# Altium PCB ESP32-S3核心板PCB封装尺寸.PcbDoc
Units mil, origin at the board's own origin, x right, y up, seen from the top; angles counter-clockwise.
Board outline 6000 x 4000 mil, 2 copper layers (Top Layer, Bottom Layer); 34 components, 0 nets, 187 pads, 0 vias.
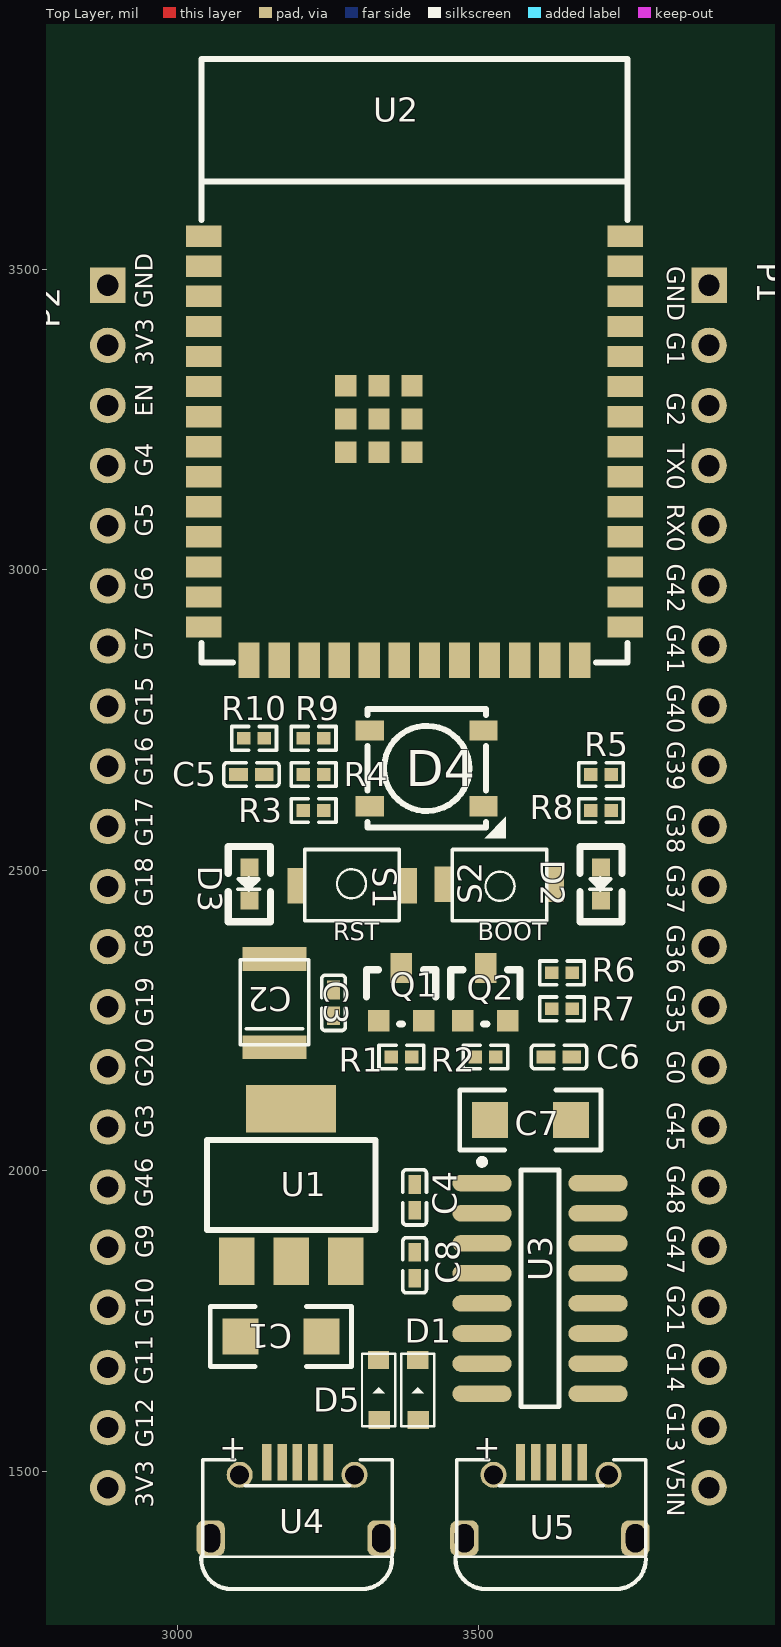
[diagram p0: Top Layer view]
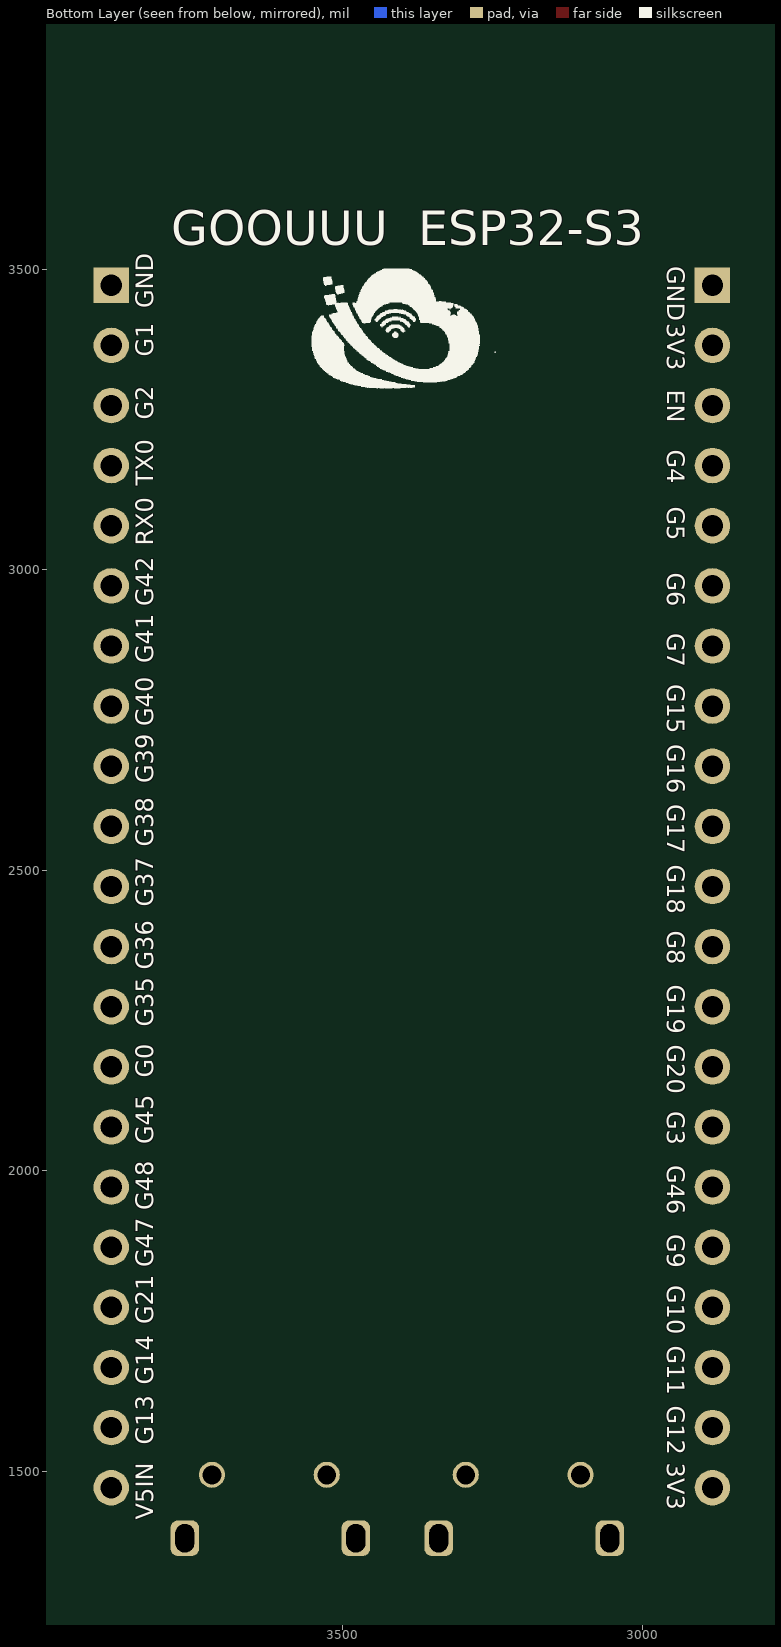
[diagram p1: Bottom Layer view, seen from below]

## Layer stack, top to bottom
Top Solder: solder mask 0.4, Solder Resist, Dk 3.5
Top Layer: signal copper 1.4
Dielectric 1: dielectric 12.6, FR-4, Dk 4.8
Bottom Layer: signal copper 1.4
Bottom Solder: solder mask 0.4, Solder Resist, Dk 3.5

## Board outline
1000,1000 7000,1000 7000,5000 1000,5000

## Design rules (kind name [scope] priority, off if disabled: settings)
Clearance [All] p1: gap=10 ignorepadtopadclearanceinfootprint=FALSE except(0: Arc-Hole Track-Hole SMDPad-Hole THPad-Hole Via-Hole Fill-Hole Poly-Hole Region-Hole Text-Hole)
PolygonConnect [All] p1: connectstyle=Relief reliefconductorwidth=10 reliefentries=4 polygonreliefangle="90 Angle" airgapwidth=10
RoutingVias [All] p1: holewidth=28 width=50 viastyle="Through Hole" minholewidth=28 minwidth=50 maxholewidth=28 maxwidth=50
SolderMaskExpansion [All] p1: expansion=4 istentingtop=FALSE
Width [All] p1: maxlimit=10 minlimit=10 preferedwidth=10
30 further rules are at their usual default settings.

## Components (designator, comment, footprint, x,y, rotation, side; value= is the part's Value field where it differs from the comment)
C1 "" 1206 3239.2,1724.46 r180 top value=100UF
C2 "100UF" 钽电容J107 3104.2,2209.46 r90 top
C3 "104" C0402 3259.2,2279.46 r270 top
C4 "104" C0402 3394.2,1955.92 r270 top
C5 "104" C0402 3122.74,2659.46 r0 top
C6 "104" C0402 3634.2,2189.46 r0 top
C7 "Cap" 1206 3519.2,2084.46 r0 top value=10UF
C8 "104" C0402 3394.2,1843 r270 top
D1 "" D0603 3399.2,1634.46 r90 top
D2 "LED" 0603D 3704.2,2504.46 r270 top
D3 "LED" 0603D 3119.2,2504.46 r270 top
D4 "XL-5050RGBC-WS2812B" LED-SMD_L5.0-W5.0-P3.20-LS5.4-TL 3414.2,2669.46 r0 top
D5 "" D0603 3334.2,1634.46 r90 top
P1 "Header 21" HDR1X21 3883.88,3472.99 r270 top
P2 "Header 21" HDR1X21 2883.88,3472.99 r270 top locked
Q1 "NPN" SOT-23 3334.2,2249.46 r0 top
Q2 "NPN" SOT-23 3474.2,2249.46 r0 top
R1 "12K" R0402 3372.16,2189.46 r180 top
R2 "12K" R0402 3512.16,2189.46 r180 top
R3 "470R" R0402 3226.24,2599.46 r0 top
R4 "12K" R0402 3226.24,2659.46 r180 top
R5 "5K" R0402 3704.2,2659.46 r0 top
R6 "470R" R0402 3639.2,2329.46 r0 top
R7 "470R" R0402 3639.2,2269.46 r0 top
R8 "470R" R0402 3704.2,2599.46 r180 top
R9 "12K" R0402 3226.24,2719.46 r180 top
R10 "0" R0402 3127.16,2719.46 r180 top
S1 "SW-PB" button 3211.2,2534.46 r0 top
S2 "SW-PB" button 3614.2,2416.35 r180 top
U1 "AMS1117-3.3" SOT223 3098.65,1849.46 r0 top
U2 "ESP32-S3-WROOM-1-N8" "ESP32-S3 W1" 3398.91,3254.84 r0 top locked
U3 "CH340C" SO-16_M 3602.75,1804.46 r0 top
U4 "ESP32-OTG" USB_T 3196.98,1452.25 r180 top
U5 "microusb" USB_T 3619.2,1452.25 r180 top

## Footprints (in the part's own frame and the unit in brackets; to place one, negate y for a bottom-side part, rotate by r counter-clockwise, add the part's x,y. Pads: shape width x height; smd on the part's side, far side on the other; paste and mask are expansions set on the pad)
0603D [mil]
  rect 30x30 smd: A(0,0) K(55,0)
  silkscreen extent -35,-35 90,35
1206 [mil]
  rect 60x60 smd: 1(0,0) 2(135,0)
  silkscreen extent -50,-50 185,50
button [mil]
  rect 27.56x59.06 smd: 1(-15,-60) 2(173,-60)
  silkscreen extent 0,-118 157,0
C0402 [mm]
  rect 0.79x0.54 smd: 1(-0.545,0) 2(0.545,0)
  silkscreen extent -1.17,-0.5 1.17,0.5
D0603 [mm]
  rect 0.75x0.9 smd: 1(-1.245,-0.025) 2(1.295,0)
  silkscreen extent -1.5,-0.7 1.55,0.7, body extent -0.77,-0.4 0.83,0.4, height 0.6
"ESP32-S3 W1" [mm]
  rect 1.5x0.9 smd mask+0.05: 1(-9.029,7.61) 2(-9.029,6.34) 3(-9.029,5.07) 4(-9.029,3.8) 5(-9.029,2.53) 6(-9.029,1.26) 7(-9.029,-0.01) 8(-9.029,-1.28) 9(-9.029,-2.55) 10(-9.029,-3.82) 11(-9.029,-5.09) 12(-9.029,-6.36) 13(-9.029,-7.63) 14(-9.029,-8.9) 27(8.771,-8.9) 28(8.771,-7.63) 29(8.771,-6.36) 30(8.771,-5.09) 31(8.771,-3.82) 32(8.771,-2.55) 33(8.771,-1.28) 34(8.771,-0.01) 35(8.771,1.26) 36(8.771,2.53) 37(8.771,3.8) 38(8.771,5.07) 39(8.771,6.34) 40(8.771,7.61)
  rect 0.9x1.5 smd mask+0.05: 15(-7.114,-10.299) 16(-5.844,-10.299) 17(-4.574,-10.299) 18(-3.304,-10.299) 19(-2.034,-10.299) 20(-0.764,-10.299) 21(0.506,-10.299) 22(1.776,-10.299) 23(3.046,-10.299) 24(4.316,-10.299) 25(5.586,-10.299) 26(6.856,-10.299)
  rect 0.9x0.9 smd mask+0.051: 41(-3.029,-1.509) 41(-3.029,-0.109) 41(-3.029,1.291) 41(-1.629,-1.509) 41(-1.629,-0.109) 41(-1.629,1.291) 41(-0.229,-1.509) 41(-0.229,-0.109) 41(-0.229,1.291)
  silkscreen extent -9.13,-10.4 8.87,15.1
HDR1X21 [mm] "Connector; Header; 20 Position"
  rect 1.5x1.5 hole 0.9: 1(0,0)
  round 1.5 hole 0.9: 2(2.54,0) 3(5.08,0) 4(7.62,0) 5(10.16,0) 6(12.7,0) 7(15.24,0) 8(17.78,0) 9(20.32,0) 10(22.86,0) 11(25.4,0) 12(27.94,0) 13(30.48,0) 14(33.02,0) 15(35.56,0) 16(38.1,0) 17(40.64,0) 18(43.18,0) 19(45.72,0) 20(48.26,0) 21(50.8,0)
LED-SMD_L5.0-W5.0-P3.20-LS5.4-TL [mm]
  rect 1.2x0.85 smd mask+0.051: 1(-2.4,1.6) 2(-2.4,-1.6) 3(2.4,1.6) 4(2.4,-1.6)
  silkscreen extent -2.5,-2.95 3.35,2.5
R0402 [mm]
  rect 0.566x0.54 smd: 1(-0.433,0) 2(0.433,0)
  silkscreen extent -0.94,-0.5 0.94,0.5
SO-16_M [mm] "SOIC, 16-Leads, Body 9.9x3.9mm, Pitch 1.27mm, IPC Low Density"
  oval 2.5x0.7 smd: 1(-2.45,4.445) 2(-2.45,3.175) 3(-2.45,1.905) 4(-2.45,0.635) 5(-2.45,-0.635) 6(-2.45,-1.905) 7(-2.45,-3.175) 8(-2.45,-4.445) 9(2.45,-4.445) 10(2.45,-3.175) 11(2.45,-1.905) 12(2.45,-0.635) 13(2.45,0.635) 14(2.45,1.905) 15(2.45,3.175) 16(2.45,4.445)
  silkscreen extent -2.57,-5 0.8,5.47, body extent -2,-5 2,5, height 1.75
SOT223 [mil]
  rect 59x79 smd: 1(0,0) 2(90.55,0) 3(181.1,0)
  rect 150x79 smd: 4(89.88,253.54)
  silkscreen extent -49,52 231,202
SOT-23 [mil]
  rect 36x36 smd: 1(75,0) 2(0,0)
  rect 36x50 smd: 3(38,87.87)
  silkscreen extent -20,-5 95,85
USB_T [mm]
  rect 0.4x1.55 smd: 1(1.244,-1.608) 2(0.593,-1.608) 3(-0.056,-1.608) 4(-0.706,-1.608) 5(-1.356,-1.608)
  rrect50% 1.2x1.5 hole 0.8 slot 1.2 at 90 deg: 6(-3.612,1.608) 6(3.612,1.608)
  round 1.1 hole 0.8: 6(-2.469,-1.072) 6(2.382,-1.072)
  silkscreen extent -4.06,-1.71 3.99,2.39
钽电容J107 [mil]
  rect 39.37x106.3 smd: 1(-4,-57) 2(143,-57)
  silkscreen extent 0,-114 142,0

## Part data
C1 C2: library part "Cap Pol1", "Polarized Capacitor (Radial)", LatestRevisionDate=17-Jul-2002, LatestRevisionNote="Re-released for DXP Platform.", PackageDescription="Polarized Capacitor (Radial); 2 Leads", PackageReference=RB7.6-15, Published=8-Jun-2000, Publisher="Altium Limited"
C3 C4 C5 C6 C8: library part Cap, "Capacitor", LatestRevisionDate=17-Jul-2002, LatestRevisionNote="Re-released for DXP Platform.", PackageDescription="Radial Cap, Thru-Hole; 2 Leads; 0.3 in Pin Spacing", PackageReference=RAD-0.3, Published=8-Jun-2000, Publisher="Altium Limited"
C7: "Capacitor", LatestRevisionDate=17-Jul-2002, LatestRevisionNote="Re-released for DXP Platform.", PackageDescription="Radial Cap, Thru-Hole; 2 Leads; 0.3 in Pin Spacing", PackageReference=RAD-0.3, Published=8-Jun-2000, Publisher="Altium Limited"
D1 D5: library part "DIODE SCHOTTKY", "Schottky Diode"
D4: Color Temperature=-, Emitted Color=RGB三色, JLCPCB Part Class="Extended Part", LCSC Part Name="RGB三色 正贴 幻彩", Lens Color=无色透明, Manufacturer=XINGLIGHT(成兴光), Operating Temperature=-30℃~+70℃, Add into BOM=yes, Convert to PCB=yes, Datasheet=https://atta.szlcsc.com/upload/public/pdf/source/20230111/86AAD2096485A2E5BCAB883FF8CBE6FD.pdf, Device=XL-5050RGBC-WS2812B, Diode Configuration=-, Dominant Wavelength=-, Forward Current=-, Manufacturer Part=XL-5050RGBC-WS2812B, Mounting Sytle=正贴, Name=XL-5050RGBC-WS2812B, Peak Wavelength=625nm；470nm；530nm, Power Dissipation=-, Supplier=LCSC, Supplier Footprint=SMD5050, Supplier Part=C2843785, Symbol=XL-5050RGBC-WS2812B, Viewing Angle=120°
P1 P2: "Header, 20-Pin", LatestRevisionDate=17-Jul-2002, LatestRevisionNote="Re-released for DXP Platform.", Publisher="Altium Limited"
Q1 Q2: "NPN Transistor"
R1 R2 R3 R4 R5 R6 R7 R8 R9 R10: library part RES2
U2: JLCPCB Part Class="Extended Part", Manufacturer=ESPRESSIF(乐鑫), Add into BOM=yes, Convert to PCB=yes, Datasheet=https://atta.szlcsc.com/upload/public/pdf/source/20221026/9A44C6421221D672346AAE72DF9F8146.pdf, Device=ESP32-S3-WROOM-1-N8, LCSC Part Name=ESP32-S3-WROOM-1-N8, Manufacturer Part=ESP32-S3-WROOM-1-N8, Name=ESP32-S3-WROOM-1-N8, Supplier=LCSC, Supplier Footprint=SMD,18x25.5mm, Supplier Part=C2913198, Symbol=ESP32-S3-WROOM-1-N8
U3: library part CH340
U4: library part microusb

## Nets (pads, with @x,y where several pads share a name; then routed paths per layer and width w, separated by ;. In a path a pad name is that pad's centre, name@x,y a point inside that pad or via, vN(x,y) a via of type N, cw(c..) or ccw(c..) an arc to the next point about the centre after c; other vN are vias at no path point)
pads on no net: C1.1 C1.2 C2.1 C2.2 C3.1 C3.2 C4.1 C4.2 C5.1 C5.2 C6.1 C6.2 C7.1 C7.2 C8.1 C8.2 D1.1 D1.2 D2.A D2.K D3.A D3.K D4.1 D4.2 D4.3 D4.4 D5.1 D5.2 P1.1 P1.2 P1.3 P1.4 P1.5 P1.6 P1.7 P1.8 P1.9 P1.10 P1.11 P1.12 P1.13 P1.14 P1.15 P1.16 P1.17 P1.18 P1.19 P1.20 P1.21 P2.1 P2.2 P2.3 P2.4 P2.5 P2.6 P2.7 P2.8 P2.9 P2.10 P2.11 P2.12 P2.13 P2.14 P2.15 P2.16 P2.17 P2.18 P2.19 P2.20 P2.21 Q1.1 Q1.2 Q1.3 Q2.1 Q2.2 Q2.3 R1.1 R1.2 R2.1 R2.2 R3.1 R3.2 R4.1 R4.2 R5.1 R5.2 R6.1 R6.2 R7.1 R7.2 R8.1 R8.2 R9.1 R9.2 R10.1 R10.2 S1.1 S1.2 S2.1 S2.2 U1.1 U1.2 U1.3 U1.4 U2.1 U2.2 U2.3 U2.4 U2.5 U2.6 U2.7 U2.8 U2.9 U2.10 U2.11 U2.12 U2.13 U2.14 U2.15 U2.16 U2.17 U2.18 U2.19 U2.20 U2.21 U2.22 U2.23 U2.24 U2.25 U2.26 U2.27 U2.28 U2.29 U2.30 U2.31 U2.32 U2.33 U2.34 U2.35 U2.36 U2.37 U2.38 U2.39 U2.40 U2.41 U3.1 U3.2 U3.3 U3.4 U3.5 U3.6 U3.7 U3.8 U3.9 U3.10 U3.11 U3.12 U3.13 U3.14 U3.15 U3.16 U4.1 U4.2 U4.3 U4.4 U4.5 U4.6 U5.1 U5.2 U5.3 U5.4 U5.5 U5.6

## Other copper
Top Layer:
  pour cut-out: 2839.2,3574.46 3934.2,3574.46 3934.2,3654.46 2844.2,3654.46 2839.2,3649.46
Bottom Layer:
  pour cut-out: 2839.2,3574.46 3934.2,3574.46 3934.2,3654.46 2844.2,3654.46 2840.09,3651.83

## Silkscreen, mask and mechanical layers (free items; w line width, h text height)
Top Overlay:
  lines w7: 3041.72,1358.95 ccw(c3041.72,1356.43) 3039.2,1356.43 3039.2,1354.46 ccw(c3089.2,1354.46) 3089.2,1304.46 3306.68,1304.46 ccw(c3306.68,1354.46) 3356.68,1354.46 ; 3461.98,1358.07 3461.98,1354.46 ccw(c3511.98,1354.46) 3511.98,1304.46 3728.91,1304.46 ccw(c3728.91,1354.46) 3778.91,1354.46
  text "GND" at 3804.2,3504.46 h50 r270
  text "GND" at 2968.97,3434.46 h50 r90
  text "G1" at 3804.2,3394.46 h50 r270
  text "3V3" at 2969.02,3339.46 h50 r90
  text "G2" at 3804.2,3294.46 h50 r270
  text "EN" at 2968.6,3254.46 h50 r90
  text "TX0" at 3804.11,3209.46 h50 r270
  text "G4" at 2968.97,3154.46 h50 r90
  text "RX0" at 3804.11,3109.46 h50 r270
  text "G5" at 2968.97,3054.46 h50 r90
  text "G42" at 3804.2,3009.46 h50 r270
  text "G6" at 2968.97,2949.46 h50 r90
  text "G41" at 3804.2,2909.46 h50 r270
  text "G7" at 2968.97,2849.46 h50 r90
  text "G40" at 3804.2,2809.46 h50 r270
  text "G15" at 2968.97,2739.46 h50 r90
  text "G39" at 3804.2,2714.46 h50 r270
  text "G16" at 2968.97,2639.46 h50 r90
  text "G38" at 3804.2,2609.46 h50 r270
  text "G17" at 2968.97,2539.46 h50 r90
  text "G37" at 3804.2,2509.46 h50 r270
  text "G18" at 2968.97,2439.46 h50 r90
  text "G36" at 3804.2,2409.46 h50 r270
  text "RST" at 3259.2,2373.91 h50
  text "BOOT" at 3499.2,2373.91 h50
  text "G8" at 2968.97,2354.46 h50 r90
  text "G35" at 3804.2,2309.46 h50 r270
  text "G19" at 2969.16,2239.46 h50 r90
  text "G0" at 3804.2,2199.46 h50 r270
  text "G20" at 2969.2,2139.46 h50 r90
  text "G45" at 3804.2,2114.46 h50 r270
  text "G3" at 2969.02,2054.46 h50 r90
  text "G48" at 3804.2,2009.46 h50 r270
  text "G46" at 2968.97,1939.46 h50 r90
  text "G47" at 3804.2,1909.46 h50 r270
  text "G9" at 2969.16,1854.46 h50 r90
  text "G21" at 3804.2,1809.46 h50 r270
  text "G10" at 2969.16,1739.46 h50 r90
  text "G14" at 3804.2,1714.46 h50 r270
  text "G11" at 2968.97,1644.46 h50 r90
  text "G13" at 3804.2,1614.46 h50 r270
  text "G12" at 2969.2,1539.46 h50 r90
  text "V5IN" at 3804.2,1519.46 h50 r270
  text "3V3" at 2969.02,1439.46 h50 r90
Bottom Overlay:
  drawing of 658 lines, arcs and shapes, not listed
  text "GOOUUU  ESP32-S3" at 3784.11,3520.37 h98.43
  text "GND" at 2969.2,3504.46 h50 r90
  text "GND" at 3804.2,3434.46 h50 r270
  text "3V3" at 2969.2,3409.46 h50 r90
  text "G1" at 3804.2,3354.46 h50 r270
  text "EN" at 2969.2,3299.46 h50 r90
  text "G2" at 3804.2,3249.46 h50 r270
  text "G4" at 2969.2,3199.46 h50 r90
  text "TX0" at 3804.2,3139.46 h50 r270
  text "G5" at 2969.2,3104.46 h50 r90
  text "RX0" at 3804.2,3039.46 h50 r270
  text "G6" at 2969.2,2994.46 h50 r90
  text "G42" at 3804.2,2939.46 h50 r270
  text "G7" at 2969.2,2894.46 h50 r90
  text "G41" at 3804.2,2844.46 h50 r270
  text "G15" at 2969.2,2809.46 h50 r90
  text "G40" at 3804.2,2739.46 h50 r270
  text "G16" at 2969.2,2709.46 h50 r90
  text "G39" at 3804.2,2644.46 h50 r270
  text "G17" at 2969.2,2609.46 h50 r90
  text "G38" at 3804.2,2539.46 h50 r270
  text "G18" at 2969.2,2509.46 h50 r90
  text "G37" at 3804.2,2439.46 h50 r270
  text "G8" at 2969.2,2399.46 h50 r90
  text "G36" at 3804.2,2334.46 h50 r270
  text "G19" at 2969.2,2309.46 h50 r90
  text "G35" at 3804.2,2239.46 h50 r270
  text "G20" at 2969.2,2209.46 h50 r90
  text "G0" at 3804.2,2154.46 h50 r270
  text "G3" at 2969.2,2099.46 h50 r90
  text "G45" at 3804.2,2044.46 h50 r270
  text "G46" at 2969.2,2009.46 h50 r90
  text "G48" at 3804.2,1934.46 h50 r270
  text "G9" at 2969.2,1894.46 h50 r90
  text "G47" at 3804.2,1839.46 h50 r270
  text "G10" at 2969.2,1809.46 h50 r90
  text "G21" at 3804.2,1744.46 h50 r270
  text "G11" at 2969.2,1709.46 h50 r90
  text "G14" at 3804.2,1644.46 h50 r270
  text "G12" at 2969.2,1609.46 h50 r90
  text "G13" at 3804.2,1544.46 h50 r270
  text "3V3" at 2969.2,1514.46 h50 r90
  text "V5IN" at 3804.2,1419.46 h50 r270
Mechanical 1:
  circle w6: c2904.2,3589.46 r50
  circle w6: c3868.86,3589.46 r50
  circle w6: c2903.86,1370.12 r50
  circle w6: c3868.86,1370.12 r50
  lines w7: 2839.2,1349.46 ccw(c2884.2,1349.46) 2884.2,1304.46 3884.2,1304.46 ccw(c3884.2,1354.46) 3934.2,1354.46 3934.2,3599.46 ccw(c3884.2,3599.46) 3884.2,3649.46 3814.2,3649.46 ccw(c3814.2,3599.46) 3764.2,3599.46 cw(c3754.2,3599.46) 3754.2,3589.46 3029.2,3589.46 cw(c3029.2,3599.46) 3019.2,3599.46 ccw(c2969.2,3599.46) 2969.2,3649.46 2889.2,3649.46 ccw(c2889.2,3599.46) 2839.2,3599.46 2839.2,3574.46 2839.2,1349.46

## Text inside footprints (layer, text, board x,y; h text height)
U4: Top Overlay "+" at 3069.28,1521.45 h40
U5: Top Overlay "+" at 3491.51,1521.45 h40